# EAGLE board bb2 (EAGLE 6.5.0)
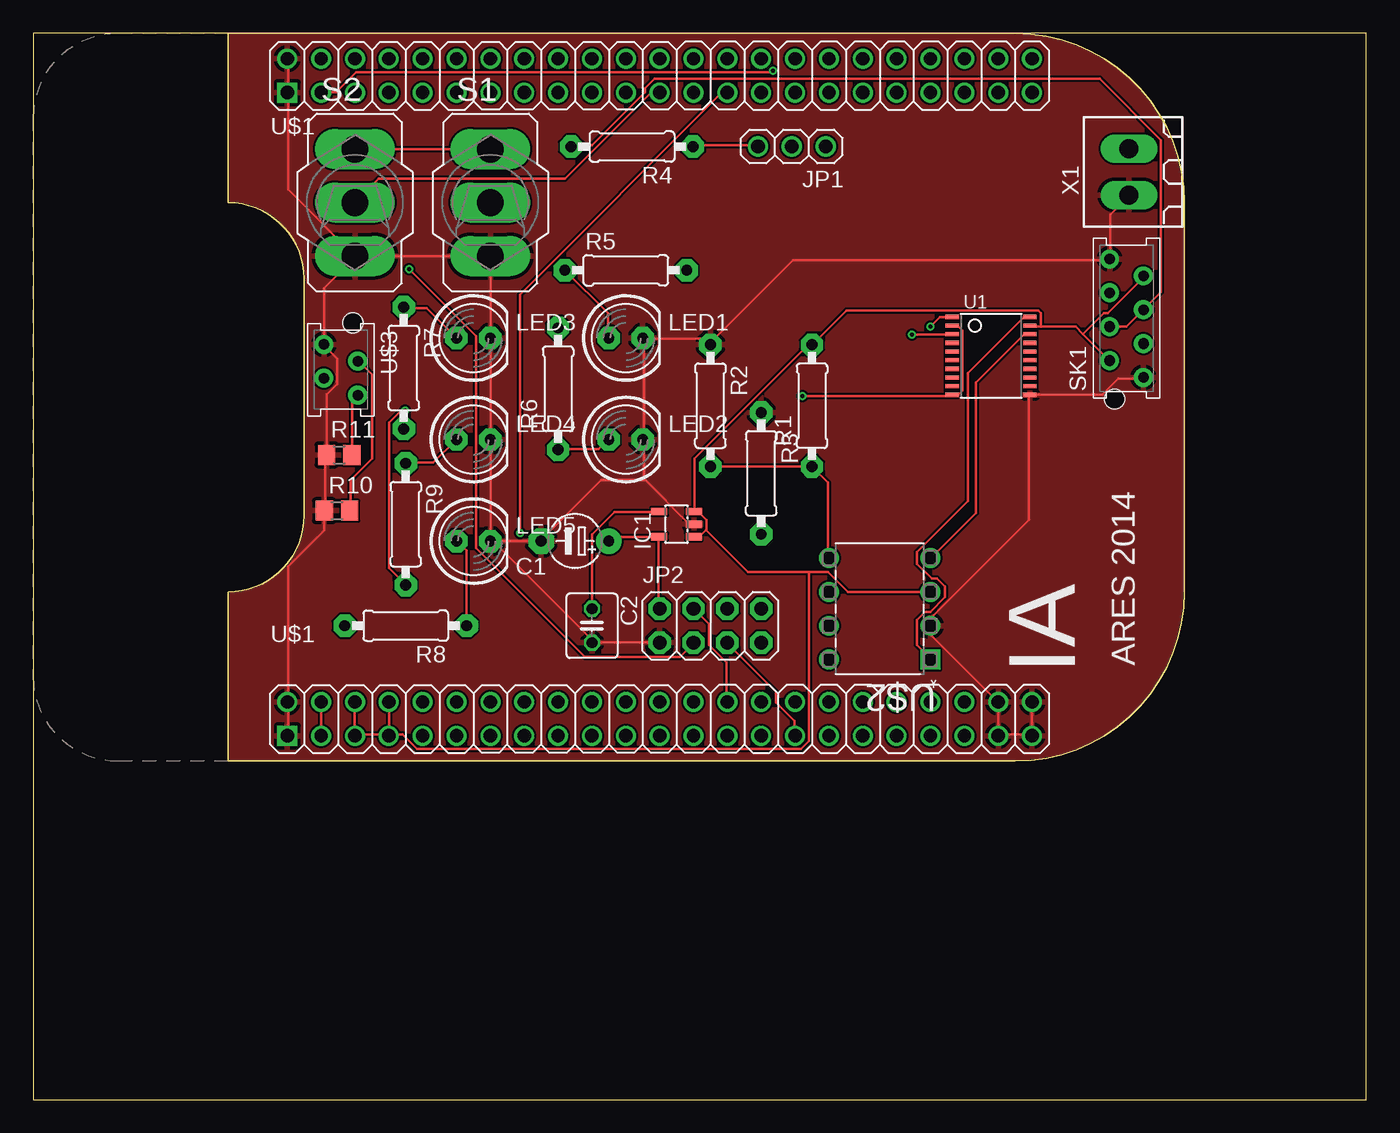
[diagram p0: board, top side]
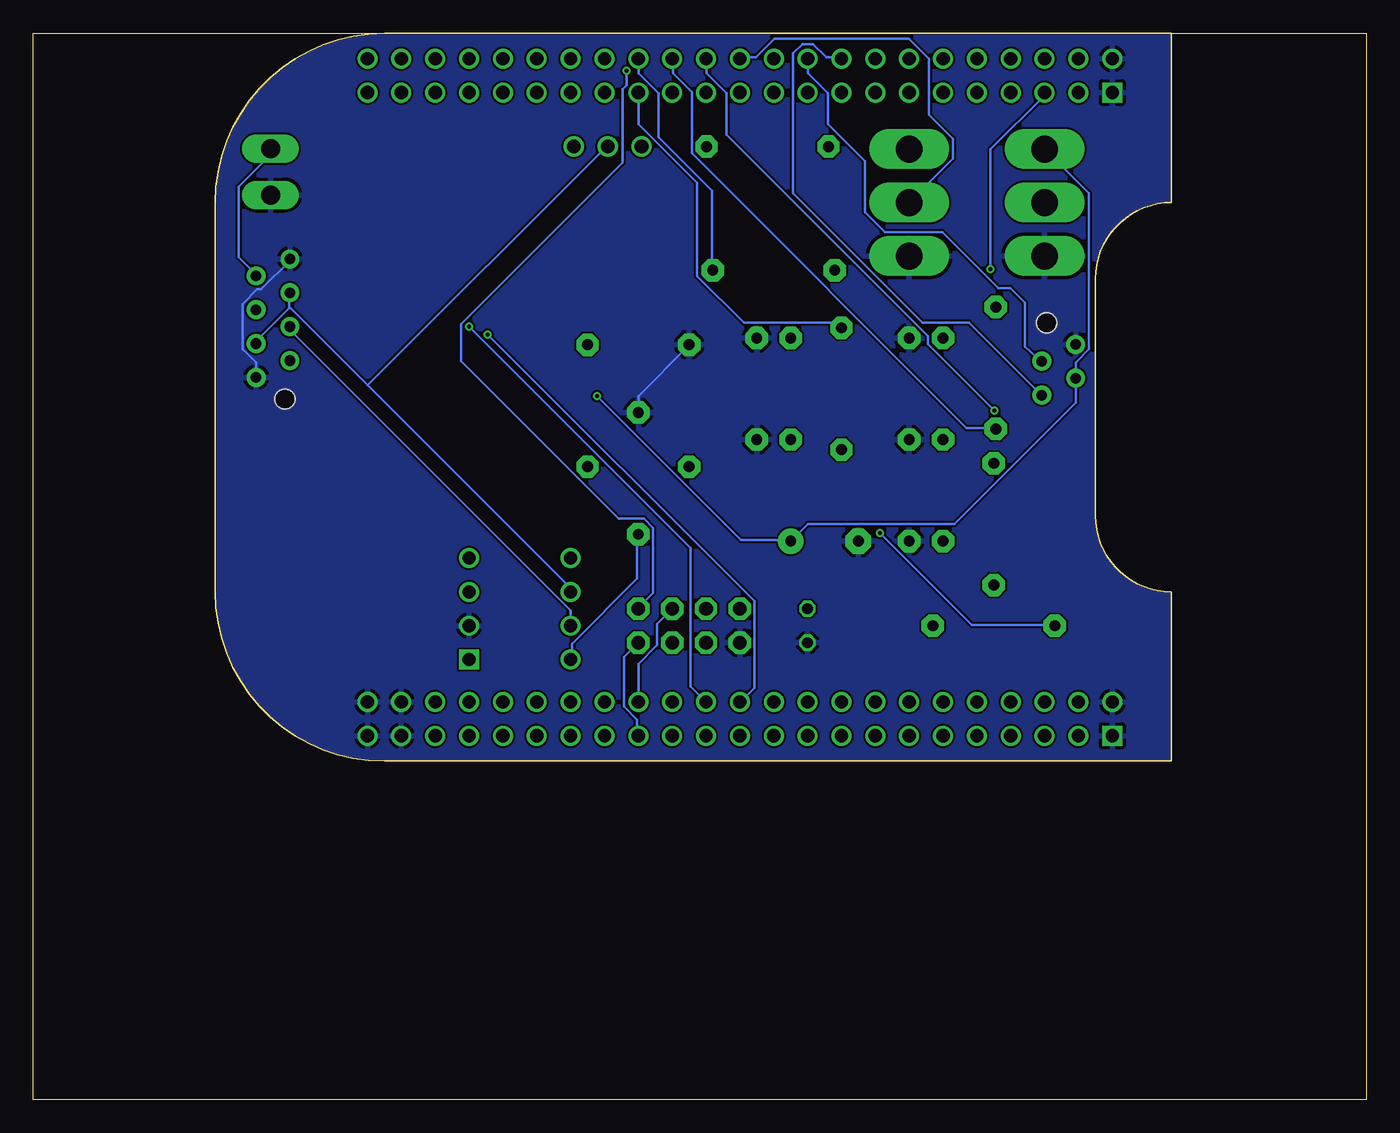
[diagram p1: board, bottom side, seen from below]

Size 100 x 80.01 mm. Coordinates in mm from the lower left corner, seen from the top.
Outline: 0,0 100,0 100,80 0,80 0,0
Copper layers (1*16): Top 0.035mm / dielectric 1.6mm / Bottom 0.035mm
Design rules "dipole *": minimum track width 0.2mm, minimum drill 0.3mm, track to track 0.15mm, track to pad 0.15mm, pad to pad 0.15mm, via to via 0.15mm, smd to smd 0.01mm, copper to edge 0.01mm, drill to drill 0.01mm, minimum pad ring 0.15mm, minimum via ring 0.15mm, stop-mask expansion 1mil, vias tented up to drill 0mil, thermal gap 10mil

## Footprints (pad centres in the part's own frame; a part is rotated, then mirrored left to right if it is on the bottom)
E5-4 = drill 0.813 pad 1.905: + -2.54,0 | drill 0.813 pad 1.905 octagon: - 2.54,0
C025-040X050 = drill 0.813 octagon: 1 -1.27,0; 2 1.27,0
SOT23-5 = smd 0.55 x 1.2: 1 -0.95,-1.3; 2 0,-1.3; 3 0.95,-1.3; 4 0.95,1.3; 5 -0.95,1.3
1X03 = drill 1.016: 1 -2.54,0; 2 0,0; 3 2.54,0
2X04 = drill 1.016 pad 1.676 octagon: 1 -3.81,-1.27; 2 -3.81,1.27; 3 -1.27,-1.27; 4 -1.27,1.27; 5 1.27,-1.27; 6 1.27,1.27; 7 3.81,-1.27; 8 3.81,1.27
LED5MM = drill 0.813 pad 1.676 octagon: A -1.27,0; K 1.27,0
0207/9 = drill 0.813 pad 1.676 octagon: 1 -4.572,0; 2 4.572,0
R0805 = smd 1.3 x 1.5: 1 -0.95,0; 2 0.95,0
320-916 = drill 2.007 long: 1 0,4.013; 2 0,0; 3 0,-4.013
AMP-215079-8 = drill 0.8 pad 1.422: 1 0,-1.27; 2 1.27,1.27; 3 2.54,-1.27; 4 3.81,1.27; 5 5.08,-1.27; 6 6.35,1.27; 7 7.62,-1.27; 8 8.89,1.27 | hole 1.5: -1.62,0.905
TSSOP20 = smd 0.305 x 0.991: 1 -2.925,-2.918; 2 -2.275,-2.918; 3 -1.625,-2.918; 4 -0.975,-2.918; 5 -0.325,-2.918; 6 0.325,-2.918; 7 0.975,-2.918; 8 1.625,-2.918; 9 2.275,-2.918; 10 2.925,-2.918; 11 2.925,2.918; 12 2.275,2.918; 13 1.625,2.918; 14 0.975,2.918; 15 0.325,2.918; 16 -0.325,2.918; 17 -0.975,2.918; 18 -1.625,2.918; 19 -2.275,2.918; 20 -2.925,2.918
BEAGLEBONE_SHIELD = drill 1 square: 1 4.445,19.05; 47 52.705,19.05 | drill 1: 2 1.905,19.05; 3 4.445,21.59; 4 1.905,21.59; 5 4.445,24.13; 6 1.905,24.13; 7 4.445,26.67; 8 1.905,26.67; 9 4.445,29.21; 10 1.905,29.21; 11 4.445,31.75; 12 1.905,31.75; 13 4.445,34.29; 14 1.905,34.29; 15 4.445,36.83; 16 1.905,36.83; 17 4.445,39.37; 18 1.905,39.37; 19 4.445,41.91; 20 1.905,41.91; 21 4.445,44.45; 22 1.905,44.45; 23 4.445,46.99; 24 1.905,46.99; 25 4.445,49.53; 26 1.905,49.53; 27 4.445,52.07; 28 1.905,52.07; 29 4.445,54.61; 30 1.905,54.61; 31 4.445,57.15; 32 1.905,57.15; 33 4.445,59.69; 34 1.905,59.69; 35 4.445,62.23; 36 1.905,62.23; 37 4.445,64.77; 38 1.905,64.77; 39 4.445,67.31; 40 1.905,67.31; 41 4.445,69.85; 42 1.905,69.85; 43 4.445,72.39; 44 1.905,72.39; 45 4.445,74.93; 46 1.905,74.93; 48 50.165,19.05; 49 52.705,21.59; 50 50.165,21.59; 51 52.705,24.13; 52 50.165,24.13; 53 52.705,26.67; 54 50.165,26.67; 55 52.705,29.21; 56 50.165,29.21; 57 52.705,31.75; 58 50.165,31.75; 59 52.705,34.29; 60 50.165,34.29; 61 52.705,36.83; 62 50.165,36.83; 63 52.705,39.37; 64 50.165,39.37; 65 52.705,41.91; 66 50.165,41.91; 67 52.705,44.45; 68 50.165,44.45; 69 52.705,46.99; 70 50.165,46.99; 71 52.705,49.53; 72 50.165,49.53; 73 52.705,52.07; 74 50.165,52.07; 75 52.705,54.61; 76 50.165,54.61; 77 52.705,57.15; 78 50.165,57.15; 79 52.705,59.69; 80 50.165,59.69; 81 52.705,62.23; 82 50.165,62.23; 83 52.705,64.77; 84 50.165,64.77; 85 52.705,67.31; 86 50.165,67.31; 87 52.705,69.85; 88 50.165,69.85; 89 52.705,72.39; 90 50.165,72.39; 91 52.705,74.93; 92 50.165,74.93
DIP254P762X432-8 = drill 0.991 square: 1 -7.62,7.62 | drill 0.991: 2 -7.62,5.08; 3 -7.62,2.54; 4 -7.62,0; 5 0,0; 6 0,2.54; 7 0,5.08; 8 0,7.62
AMP-215079-4 = drill 0.8 pad 1.422: 1 0,0; 2 1.27,2.54; 3 2.54,0; 4 3.81,2.54 | hole 1.5: -1.62,2.175
180G-2 = drill 1.422 long: 1 -1.75,0; 2 1.75,0

## Placement (x,y rotation side)
C1  2.2u  [E5-4]  40.64,41.91 180 top
C2  470p  [C025-040X050]  41.91,35.56 270 top
IC1  MIC5219BM5  [SOT23-5]  48.26,43.18 90 top
JP1  [1X03]  56.91,71.52 180 top
JP2  [2X04]  50.8,35.56 0 top
LED1  [LED5MM]  44.45,57.15 0 top
LED2  [LED5MM]  44.45,49.53 0 top
LED3  [LED5MM]  33.02,57.15 0 top
LED4  [LED5MM]  33.02,49.53 0 top
LED5  [LED5MM]  33.02,41.91 0 top
R1  47k  [0207/9]  58.42,52.07 90 top
R2  47k  [0207/9]  50.8,52.07 270 top
R3  4.7k  [0207/9]  54.61,46.99 270 top
R4  120  [0207/9]  44.92,71.51 180 top
R5  47k  [0207/9]  44.45,62.23 0 top
R6  47k  [0207/9]  39.37,53.34 90 top
R7  47k  [0207/9]  27.79,54.9 270 top
R8  47k  [0207/9]  27.94,35.56 180 top
R9  47k  [0207/9]  27.94,43.18 270 top
R10  10k  [R0805]  22.78,44.19 0 top
R11  10k  [R0805]  22.95,48.38 0 top
S1  [320-916]  34.29,67.31 0 top
S2  [320-916]  24.13,67.31 0 top
SK1  [AMP-215079-8]  82.02,54.19 90 top
U1  [TSSOP20]  71.86,55.81 270 top
U$1  BEAGLEBONE_OUTLINE  [BEAGLEBONE_SHIELD]  0,80.01 270 top
U$2  MCP2551-E/P  [DIP254P762X432-8]  59.69,40.64 180 top
U$3  MMATCH-4-  [AMP-215079-4]  21.8,56.67 270 top
X1  [180G-2]  82.21,69.62 90 top

## Library data of the parts
C1 C2 = resistor
IC1 = v-reg-micrel; MF: ALTERA CORPORATION; MPN: MIC5219BM5 TR; OC_FARNELL: 1100656; OC_NEWARK: 09J8939
JP1 JP2 LED1-LED5 R1-R9 U1 U$1 = adafruit
R10 R11 = rcl
S1 S2 = switch
SK1 U$3 = jt-con-micromatch
U$2 = mcp2551; MPN: MCP2551-E/P; OC_FARNELL: 1439745; OC_NEWARK: 69K7603; PACKAGE: DIP-8; SUPPLIER: Microchip
X1 = con-weidmueller-sl35; OC_FARNELL: unknown; OC_NEWARK: unknown

## Nets
AIN0: U$1.85
COULEUR: R11.2 U$1.18 U$3.4
DCAN1_RX: U1.3 U$1.70
DCAN1_TX: U1.1 U$1.72
GND: C1.- C2.2 IC1.2 JP2.1 LED1.K LED2.K LED3.K LED4.K LED5.K R2.1 R3.1 R10.1 R11.1 S1.3 S2.3 SK1.1 SK1.8 U1.11 U$1.1 U$1.2 U$1.47 U$1.48 U$1.89 U$1.90 U$1.91 U$1.92 U$2.2 U$3.1 X1.1
N$1: R1.1 R2.2 U$2.5
N$2: JP1.3 R4.1
N$3: R3.2 U$2.8
N$4: C2.1 IC1.4
N$5: R5.2 U$1.30
N$6: R6.2 U$1.29
N$7: R7.2 U$1.28
N$9: R9.2 U$1.26
N$10: LED5.A R8.1
N$11: S1.2 U$1.24
N$12: S2.2 U$1.23
N$13: R8.2 U$1.27
N$15: JP1.2 SK1.3 SK1.6 U$2.6
N$16: R4.2 SK1.4 SK1.5 U$2.7
N$19: LED2.A R6.1
N$20: LED1.A R5.1
N$21: LED3.A R7.1
N$22: LED4.A R9.1
RXD: U1.18 U$2.4
SPI_CE: JP2.3 U$1.5
SPI_CS: JP2.4 U$1.74
SPI_IRQ: JP2.8 U$1.3
SPI_MISO: JP2.7 U$1.75
SPI_MOSI: JP2.6 U$1.76
SPI_SCLK: JP2.5 U$1.77
TIRETTE: R10.2 U$1.20 U$3.2
TXD: U1.20 U$2.1
VDD: IC1.1 IC1.3 R1.2 SK1.2 SK1.7 U1.19 U$1.51 U$1.52 U$1.53 U$1.54 U$2.3 X1.2
VDD_3V3: C1.+ IC1.5 JP2.2 S1.1 S2.1 U1.2 U1.10 U$3.3
VDD_3V3EXP: U$1.49 U$1.50

## Tracks (layer width: path | path; a pad name or v marks a point on that pad's centre or on a via)
COULEUR
  Top 0.2: R11.2 23.9,52.4 24.3,52.8 U$3.4
  Bottom 0.2: U$1.18 39.4,78.2 40.5,78.2 41.5,79.2 42.3,79.2 43,78.5 43,68 33.3,58.3 29.8,58.3 24.4,52.9 U$3.4
DCAN1_RX  (via drill 0.3)
  Top 0.2: v65.9,57.4 68.9,57.4 U1.3
  Bottom 0.2: v65.9,57.4 45.9,37.4 45.9,30.9 46.9,29.9 U$1.70
DCAN1_TX  (via drill 0.3)
  Top 0.2: v67.3,58 68,58.7 68.9,58.7 U1.1
  Bottom 0.2: v67.3,58 50.7,41.4 50.7,31 49.6,29.9 U$1.72
GND
  Top 0.2: U$1.92 74.9,29.8 74.9,27.5 U$1.91 74.9,27.4 72.5,27.4 U$1.89 72.4,27.4 72.4,29.8 U$1.90 72.3,29.9 67.4,34.8 67.4,35.5 U$2.2 67.4,35.6 67.4,36.2 74.7,43.5 74.7,52.8 U1.11 74.8,52.9 80.2,52.9 81.4,54.1 83.2,54.1 SK1.1 | X1.1 82.2,67.8 80.8,66.4 80.8,63.1 SK1.8 80.7,63 57,63 50.8,56.8 R2.1 50.8,56.7 50.4,57.1 45.8,57.1 LED1.K 45.8,57 45.8,49.6 LED2.K 45.8,49.5 45.8,46.6 45.85,46.55 | 45.85,46.55 49.2,43.2 49.5,43.2 IC1.2 | JP2.1 46.9,34.3 42,34.3 C2.2 42,34.4 34.5,41.9 | 34.5,41.9 C1.- 38.1,42 42.6,46.5 45.8,46.5 45.85,46.55 | 34.5,41.9 LED5.K | 34.5,41.9 LED5.K | LED5.K 34.3,42 34.3,49.5 LED4.K 34.3,49.6 34.3,57.1 LED3.K 34.3,57.2 34.3,63.2 S1.3 34.2,63.3 24.2,63.3 S2.3 | U$1.2 19.1,78.1 19.1,75.6 U$1.1 19.1,75.5 19.1,68.3 24.1,63.3 S2.3 | U$1.47 19.1,27.4 19.1,29.8 U$1.48 19.1,29.9 19.1,40 21.8,42.7 21.8,44.1 R10.1 21.9,44.2 21.9,48.2 22,48.3 R11.1 22,52.9 22.8,53.7 22.8,55.6 21.8,56.6 U$3.1 21.8,60.9 24.1,63.2 S2.3
  Bottom 0.2: SK1.1 83.3,55.3 84.3,56.3 84.3,59.7 83.2,60.8 82.9,60.8 80.7,63 SK1.8 | R3.1 54.6,51.6 54.6,52.8 50.8,56.6 R2.1
  pour Top: -4.8,86.5 90.3,86.5 90.3,21 -4.8,21
  pour Bottom: -5.9,90.1 94.8,90.1 94.8,18.6 -5.9,18.6
N$1
  Top 0.2: U$2.5 59.6,40.7 59.6,46.3 58.5,47.4 R1.1 58.4,47.5 R2.2
N$2
  Top 0.2: JP1.3 54.3,71.6 49.5,71.6 R4.1
N$3
  Bottom 0.2: U$2.8 59.6,33.1 59.6,34.2 54.7,39.1 54.7,42.4 R3.2
N$4
  Top 0.2: IC1.4 46.9,44.1 43.6,44.1 41.9,42.4 41.9,36.9 C2.1
N$5
  Bottom 0.2: U$1.30 54.6,77 53.1,75.5 53.1,72.2 49.1,68.2 49.1,62.3 R5.2
N$6
  Bottom 0.2: U$1.29 54.6,75.5 54.6,73.2 50.2,68.8 50.2,61.8 46.7,58.3 39.7,58.3 39.4,58 R6.2
N$7
  Bottom 0.2: U$1.28 52,78.1 52,77 50.6,75.6 50.6,71 30,50.4 27.8,50.4 R7.2
N$9  (via drill 0.3)
  Top 0.2: v27.9,51.7 27.6,51.7 26.7,50.8 26.7,39.9 27.9,38.7 R9.2
  Bottom 0.2: v27.9,51.7 32.9,56.7 32.9,57.3 48,72.4 48,75.5 49.5,77 49.5,78.1 U$1.26
N$10
  Top 0.2: R8.1 32.5,35.6 32.5,41.2 31.8,41.9 LED5.A
N$11
  Bottom 0.2: S1.2 31,70.6 31,72.1 32.8,73.9 32.8,78.1 34.3,79.6 44.4,79.6 45.8,78.2 46.9,78.2 U$1.24
N$12
  Top 0.2: U$1.23 46.9,75.5 46.3,75.5 39.9,69.1 25.9,69.1 24.2,67.4 S2.2
N$13  (via drill 0.3)
  Top 0.2: v36.5,42.5 36.5,60.4 51.6,75.5 52,75.5 U$1.27
  Bottom 0.2: v36.5,42.5 29.6,35.6 23.4,35.6 R8.2
N$15
  Bottom 0.2: 80.8,59.5 80.8,59.4 83.2,57 83.2,56.8 SK1.3 | 80.8,59.5 80.8,60.5 SK1.6 | 80.8,59.5 74.9,53.6 | 74.9,53.6 59.7,38.4 U$2.6 | 74.9,53.6 57,71.5 JP1.2
N$16
  Top 0.2: SK1.4 82,58 83.2,59.2 SK1.5 83.3,59.3 84.6,60.6 84.6,72 80,76.6 46.6,76.6 45.9,75.9 45.9,75.6 41.9,71.6 40.4,71.6 R4.2
  Bottom 0.2: U$2.7 59.7,35.6 59.7,36.7 80.7,57.7 80.7,58 SK1.4
N$19
  Top 0.2: R6.1 39.4,48.8 42.4,48.8 43.1,49.5 LED2.A
N$20
  Top 0.2: LED1.A 43.1,57.2 43.1,59 39.9,62.2 R5.1
N$21
  Top 0.2: LED3.A 29.5,59.4 27.8,59.4 R7.1
N$22
  Top 0.2: R9.1 28,47.8 30,47.8 31.7,49.5 LED4.A
RXD
  Top 0.2: U1.18 74.7,57.4 74.3,57.4 70.7,53.8 70.7,44 67.4,40.7 U$2.4
SPI_CE  (via drill 0.3)
  Top 0.2: v28.2,62.3 33.2,57.3 33.2,41.4 41.4,33.2 48.5,33.2 49.5,34.2 JP2.3
  Bottom 0.2: v28.2,62.3 28.2,71.3 24.2,75.3 24.2,75.5 U$1.5
SPI_CS
  Top 0.2: U$1.74 52,29.9 52,32.8 50.7,34.1 50.7,35.7 49.6,36.8 JP2.4
SPI_IRQ  (via drill 0.3)
  Top 0.2: v55.5,77.2 55.4,77.1 24.2,77.1 22.7,75.6 21.6,75.6 U$1.3
  Bottom 0.2: v55.5,77.2 55.5,76.1 55.8,75.8 55.8,70.3 67.9,58.2 67.9,55.4 56.1,43.6 54.2,43.6 53.5,42.9 53.5,38 54.6,36.9 JP2.8
SPI_MISO
  Bottom 0.2: JP2.7 55.7,33.2 55.7,29.5 54.7,28.5 54.7,27.4 U$1.75
SPI_MOSI
  Bottom 0.2: JP2.6 53.2,35.7 53.2,34.1 54.6,32.7 54.6,29.9 U$1.76
SPI_SCLK
  Top 0.2: U$1.77 57.1,27.4 57.1,28.4 55.7,29.8 55.7,30.6 52.1,34.2 JP2.5
TIRETTE
  Top 0.2: R10.2 23.8,44.2 23.8,46.5 25.4,48.1 25.4,54.4 24.4,55.4 U$3.2
  Bottom 0.2: U$1.20 41.9,77 40.4,75.5 40.4,73.2 37.6,70.4 37.6,66.6 36.1,65.1 31.8,65.1 27.6,60.9 26.7,60.9 25.6,59.8 25.6,56.5 24.4,55.4 U$3.2
TXD
  Top 0.2: U1.20 74.7,58.7 74.3,58.7 70.1,54.5 70.1,44.9 66.3,41.1 66.3,40.2 67.4,39.1 67.8,39.1 68.4,38.5 68.4,37.7 67.3,36.6 66.9,36.6 66.3,36 66.3,34.1 67.3,33.1 U$2.1
VDD
  Top 0.2: 75.6,58 78.2,58 78.75,57.45 | 75.6,58 74.8,58 U1.19 | 78.75,57.45 80.7,55.5 SK1.2 | 78.75,57.45 80.3,59 80.6,59 83.2,61.6 83.2,61.8 SK1.7 | U$1.52 24.1,29.8 24.1,27.4 U$1.51 24.2,27.4 26.6,27.4 U$1.53 | U$1.53 26.7,27.4 26.7,29.8 U$1.54 | 50.45,42.75 50.5,42.8 50.5,43.5 49.9,44.1 49.6,44.1 IC1.3 49.6,44.2 49.6,48.1 58.1,56.6 58.4,56.6 R1.2 58.5,56.7 61,59.2 75.4,59.2 75.6,59 75.6,58 | 50.45,42.75 50,42.3 49.6,42.3 IC1.1 | U$2.3 61.1,38.1 59.6,39.6 58.2,39.6 | 58.2,39.6 53.6,39.6 50.45,42.75 | 58.2,39.6 58.2,26.9 57.6,26.3 28.8,26.3 27.7,27.4 26.8,27.4 U$1.53
  Bottom 0.2: X1.2 82.3,71.3 82.3,70.8 84.6,68.5 84.6,63.2 83.3,61.9 SK1.7
VDD_3V3  (via drill 0.3)
  Top 0.2: S1.1 34.2,71.3 24.2,71.3 S2.1 | U1.2 69,58 69.4,58 69.7,57.7 69.7,53.2 69.4,52.9 69,52.9 U1.10 68.9,52.8 v57.7,52.8 | C1.+ 43.2,42 43.4,42.2 46.9,42.2 IC1.5 46.9,42.1 46.9,36.9 JP2.2
  Bottom 0.2: S2.1 24.1,71.3 20.8,68 20.8,56.3 21.8,55.3 U$3.3 21.8,52.3 30.9,43.2 41.9,43.2 43.1,42 C1.+ 43.2,42 46.9,42 v57.7,52.8
VDD_3V3EXP
  Top 0.2: U$1.49 21.6,27.4 21.6,29.8 U$1.50

## Text on the board
tPlace: ARES 2014 | IA